# Altium PCB inverter.PcbDoc
Units mm, origin at the board's own origin, x right, y up, seen from the top; angles counter-clockwise.
Board outline 80.02 x 80 mm, 2 copper layers (Top Layer, Bottom Layer), stack 1.671 mm thick; 65 components, 34 nets, 220 pads, 421 vias.
Unrouted connection lines stored in the file: 3.
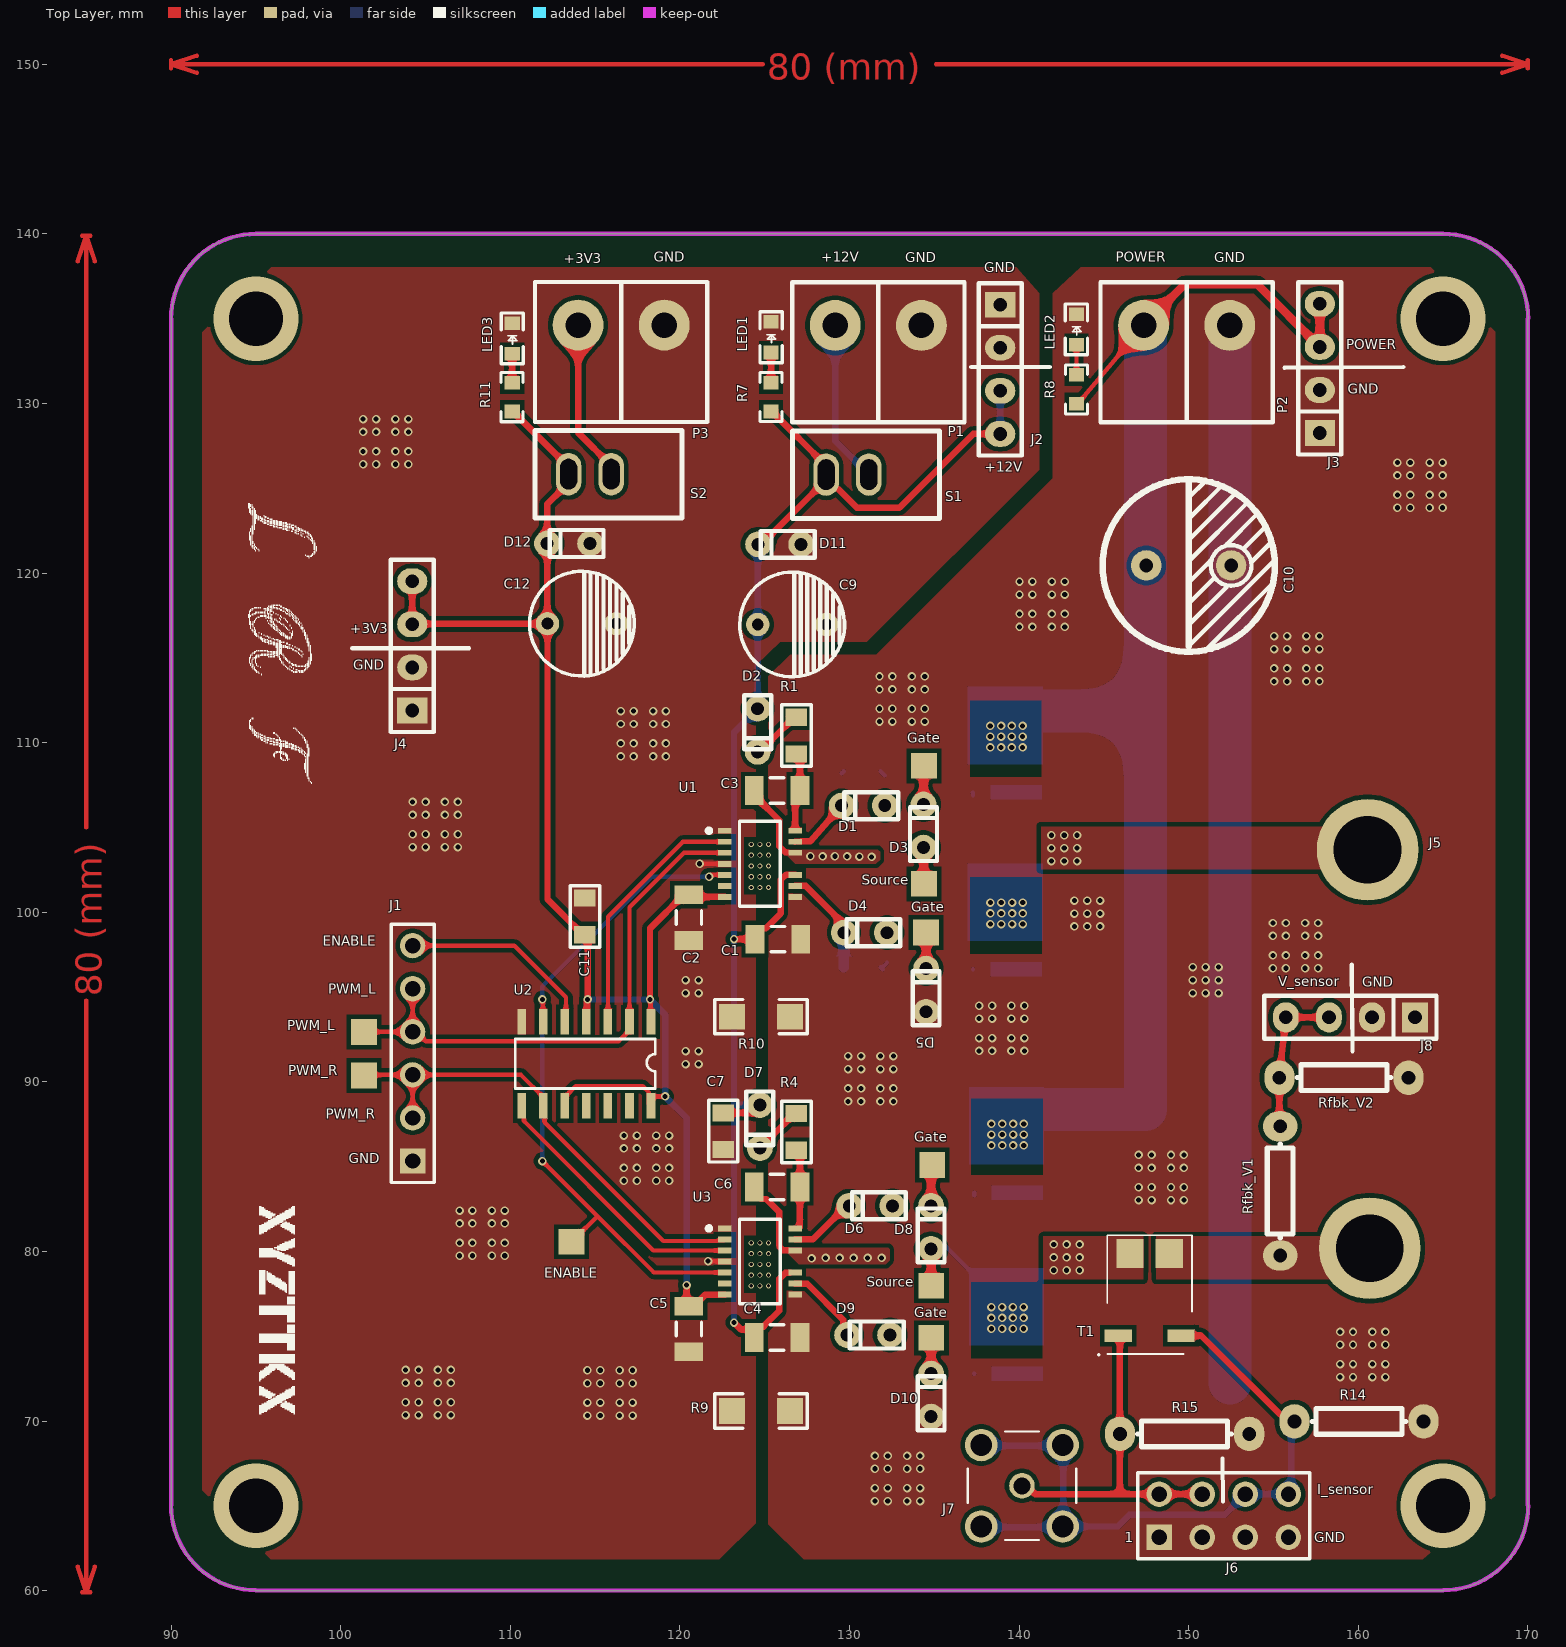
[diagram p0: Top Layer view]
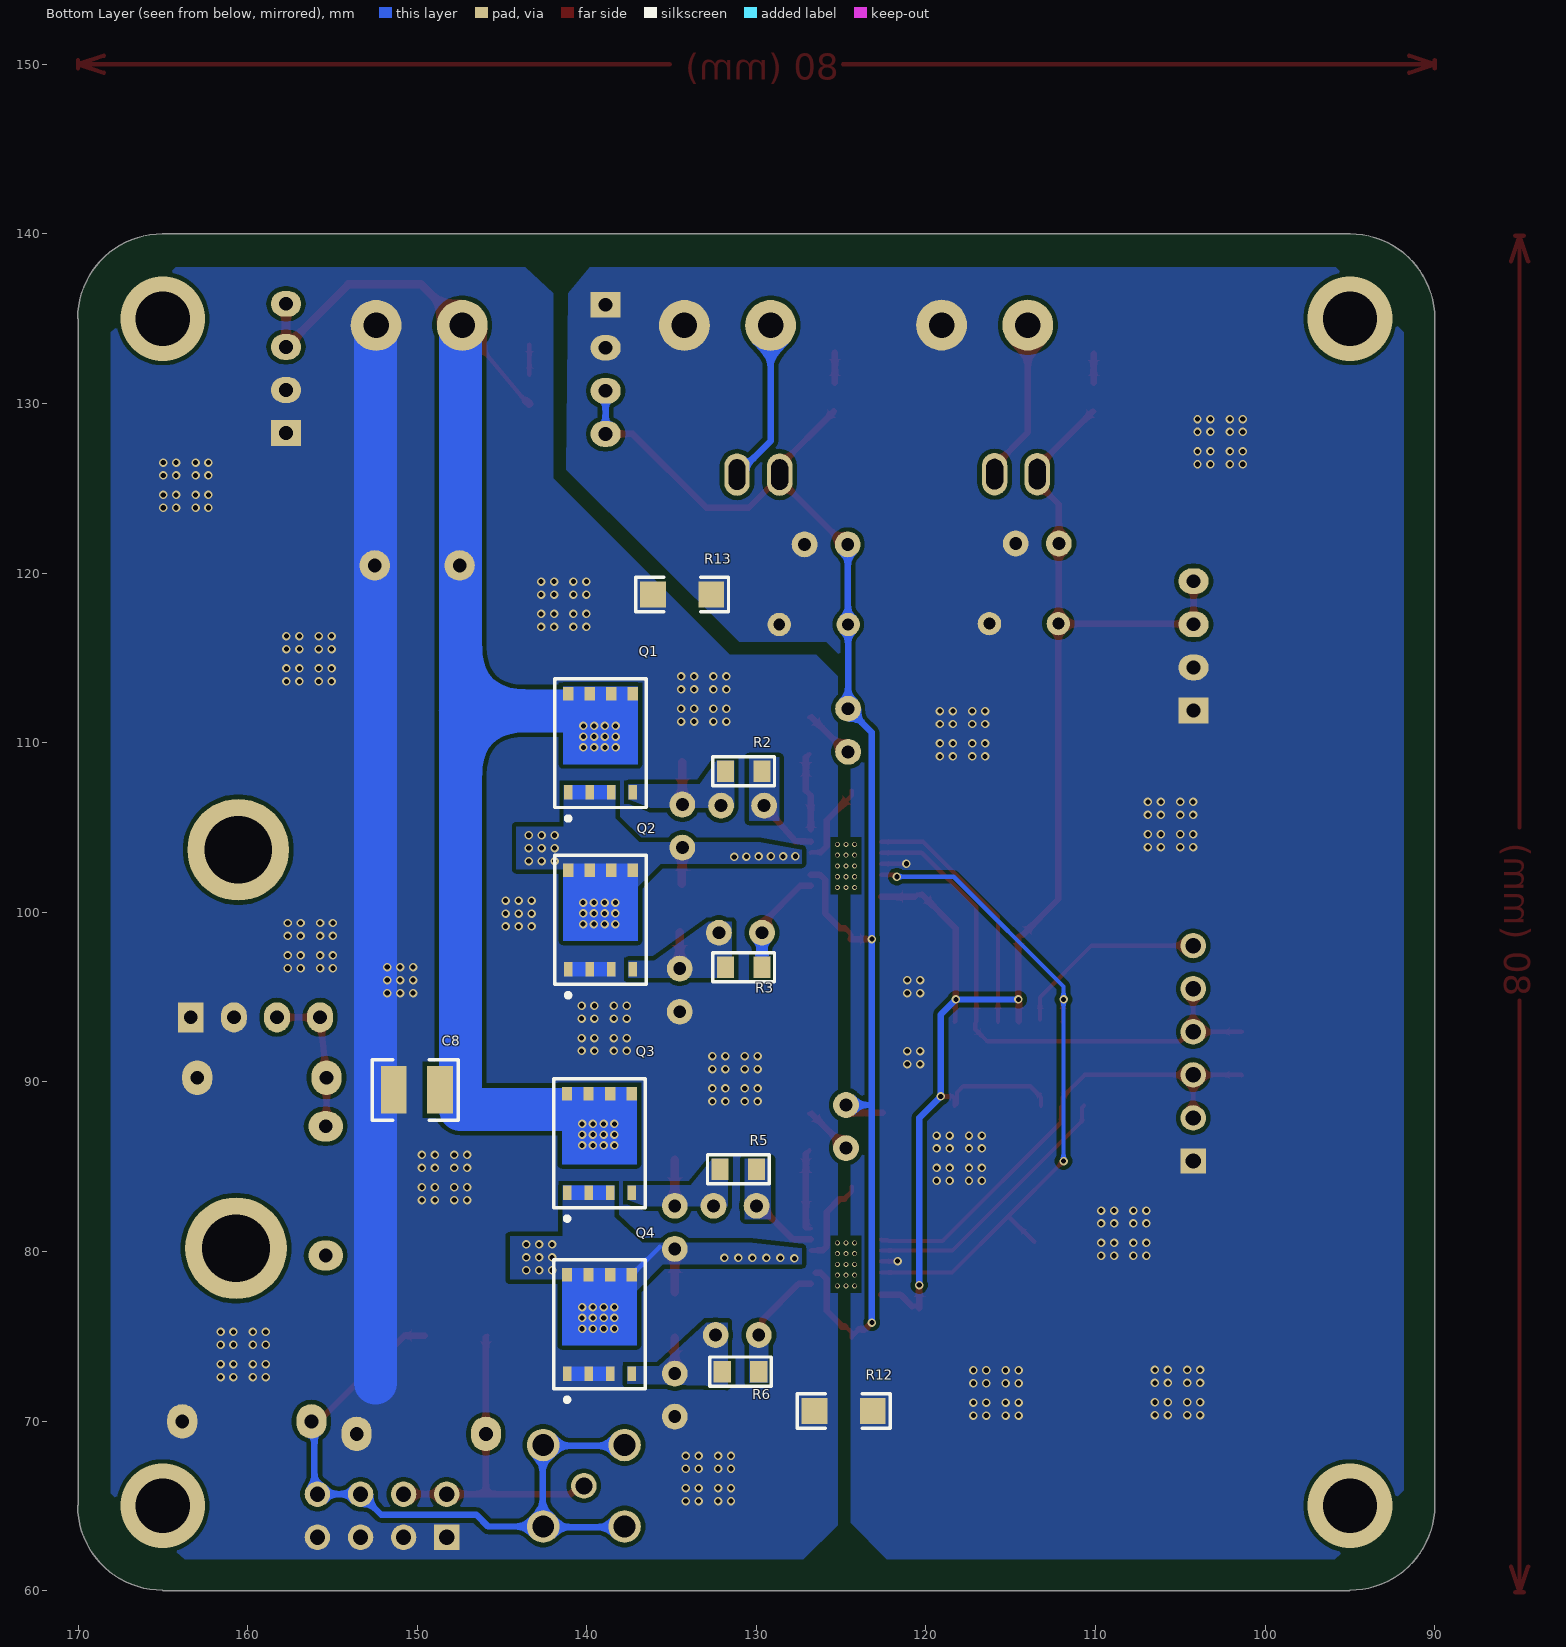
[diagram p1: Bottom Layer view, seen from below]
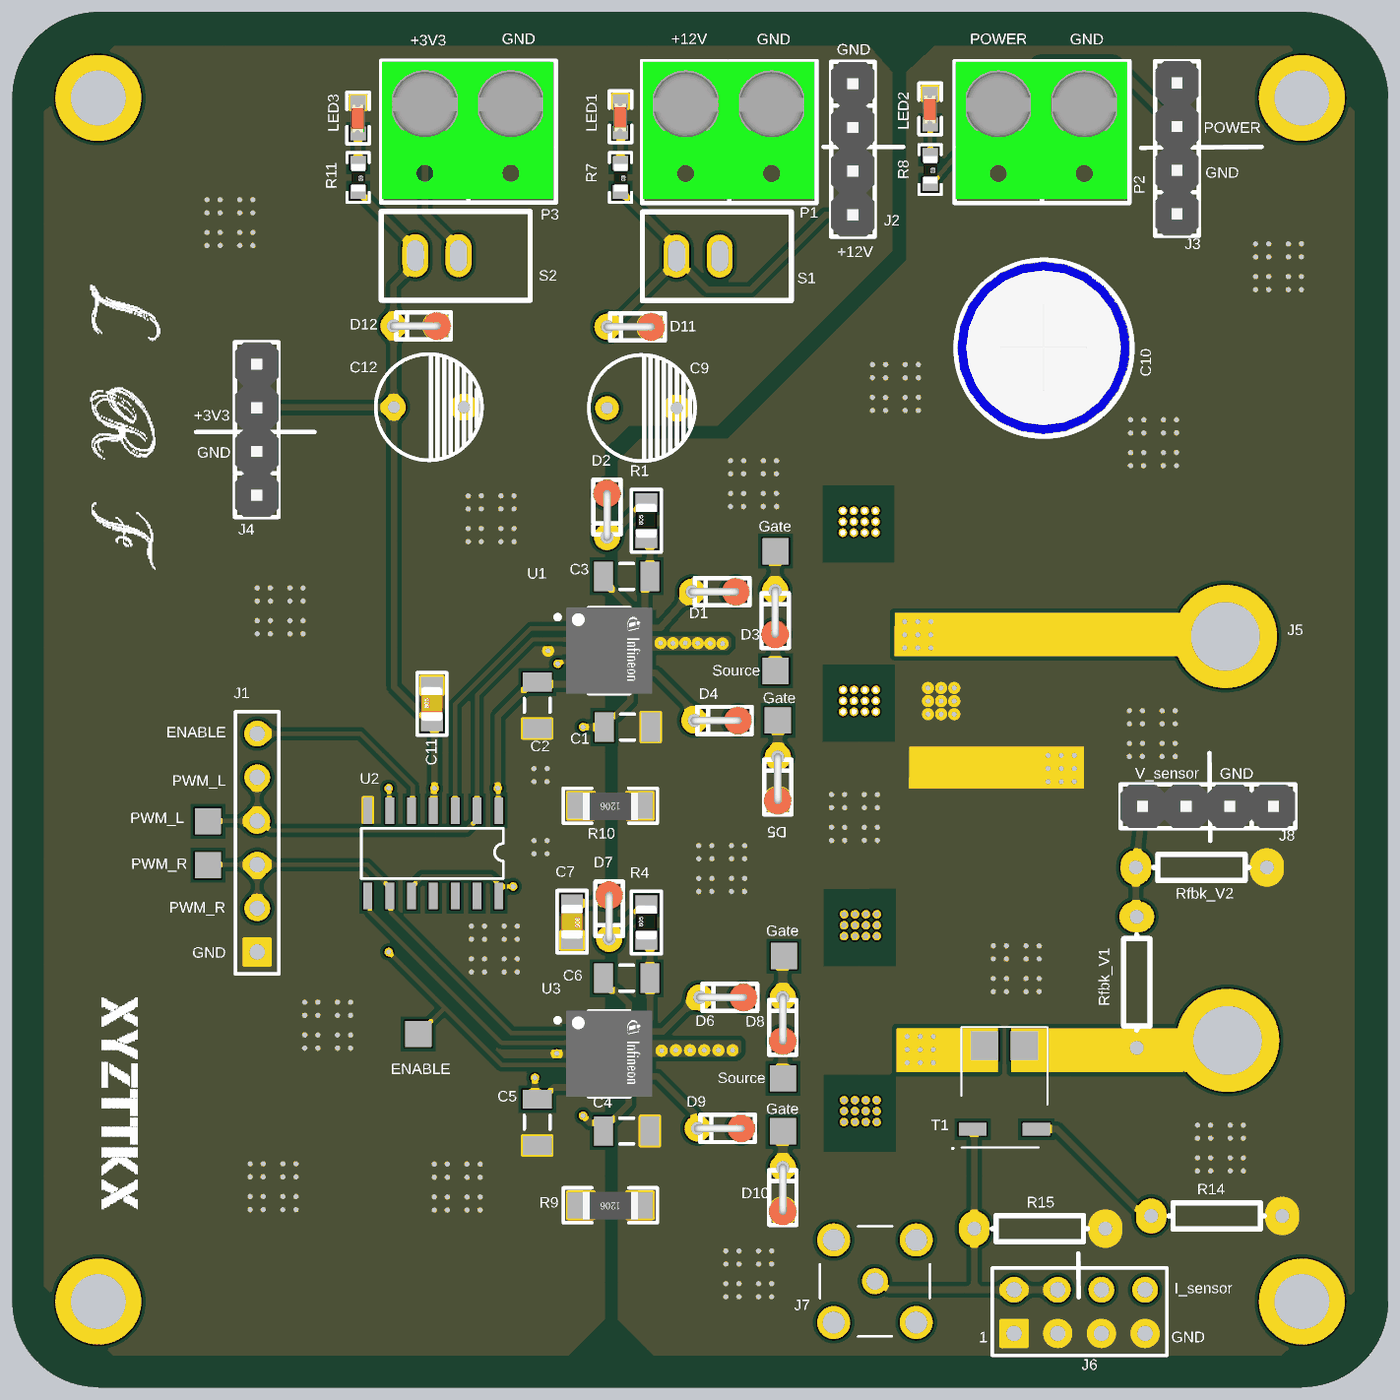
[diagram p2: 3D render of the assembled board from above, using the file's embedded part models]
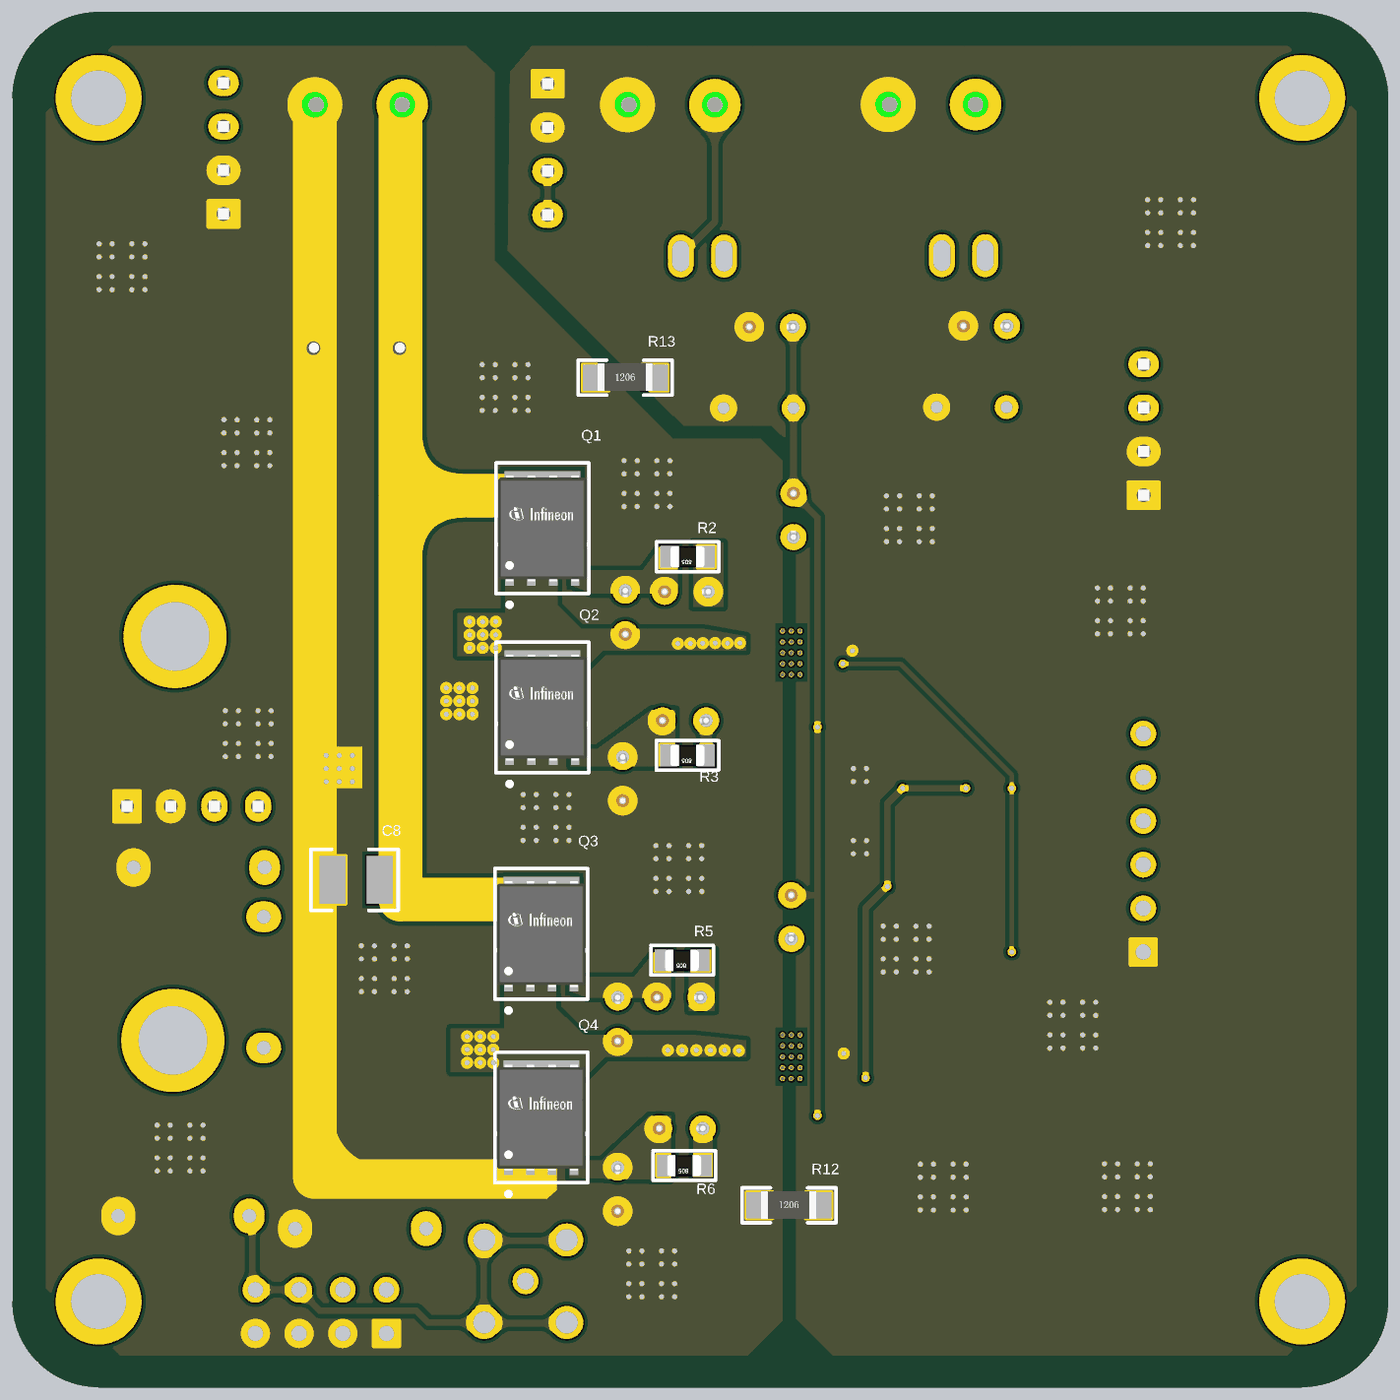
[diagram p3: 3D render of the assembled board from below, using the file's embedded part models]

## Layer stack, top to bottom
Top Solder: solder mask 0.0102, Solder Resist, Dk 3.5
Top Layer: signal copper 0.0356
Dielectric 1: dielectric 1.6, FR-4, Dk 4.8
Bottom Layer: signal copper 0.0356
Bottom Solder: solder mask 0.0102, Solder Resist, Dk 3.5

## Board outline
89.996,65.024 ccw(c94.996,65.024) 94.996,60.024 94.996,60 165,60 165.02,60.024 ccw(c165.02,65.024) 170.02,65.024 170,65.024 170,135.001 170.02,135.001 ccw(c165.02,135.001) 165.02,140.001 165,140 94.996,140 94.996,140.001 ccw(c94.996,135.001) 89.996,135.001 90,135.001

## Design rules (kind name [scope] priority, off if disabled: settings)
Clearance [All] p1: gap=0.254 ignorepadtopadclearanceinfootprint=FALSE except(0: Arc-Hole Track-Hole SMDPad-Hole THPad-Hole Via-Hole Fill-Hole Poly-Hole Region-Hole Text-Hole)
ComponentClearance [All] p1 off: gap=0.254 collisioncheckmode=3 verticalgap=0.254 showdistances=FALSE
DiffPairsRouting [All] p1 off: maxlimit=0.254 minlimit=0.254 mostfreqgap=0.254 toplayer_minwidth=0.381 toplayer_maxwidth=0.381 toplayer_prefwidth=0.381 bottomlayer_minwidth=0.381 bottomlayer_maxwidth=0.381 bottomlayer_prefwidth=0.381 maxuncoupledlength=12.7
FanoutControl Fanout_BGA [IsBGA] p1 off: bgadir=Out bgaviamode=Centered fanoutstyle=Auto fanoutdirection=Alternating viagrid=0.025 // Fanout_BGA (Default Rule)
FanoutControl Fanout_LCC [IsLCC] p2 off: bgadir=Out bgaviamode=Centered fanoutstyle=Auto fanoutdirection=Alternating viagrid=0.025 // Fanout_LCC (Default Rule)
FanoutControl Fanout_SOIC [IsSOIC] p3 off: bgadir=Out bgaviamode=Centered fanoutstyle=Auto fanoutdirection=Alternating viagrid=0.025 // Fanout_SOIC (Default Rule)
FanoutControl Fanout_Small [(CompPinCount < 5)] p4 off: bgadir=Out bgaviamode=Centered fanoutstyle=Auto fanoutdirection=OutThenIn viagrid=0.025 // Fanout_Small (Default Rule)
FanoutControl Fanout_Default [All] p5 off: bgadir=Out bgaviamode=Centered fanoutstyle=Auto fanoutdirection=Alternating viagrid=0.025 // Fanout_Default (Default Rule)
PlaneConnect PlaneConnect_1 [All] p1: planeconnectstyle=Relief reliefexpansion=0.508 reliefentries=4 reliefconductorwidth=0.254 reliefairgap=0.254
PolygonConnect [All] p1: connectstyle=Direct reliefconductorwidth=0.254 reliefentries=4 polygonreliefangle="90 Angle" airgapwidth=0.254
PolygonConnect PolygonConnect_1 [All] p2: connectstyle=Relief reliefconductorwidth=0.254 reliefentries=4 polygonreliefangle="90 Angle" airgapwidth=0.254
RoutingCorners [All] p1 off: cornerstyle=45-Degree minsetback=2.54 maxsetback=2.54
RoutingLayers [All] p1 off: top layer_v5=TRUE bottom layer_v5=TRUE
RoutingPriority [All] p1 off: routingpriority=0
RoutingTopology [All] p1 off: topology=Shortest
RoutingVias [All] p1 off: holewidth=0.711 width=1.27 viastyle="Through Hole" minholewidth=0.711 minwidth=0.2 maxholewidth=0.711 maxwidth=1.27
RoutingVias RoutingVias_1 [All] p2 off: holewidth=0.711 width=1.27 viastyle="Through Hole" minholewidth=0.711 minwidth=1.27 maxholewidth=0.711 maxwidth=1.27
SolderMaskExpansion [All] p1: expansion=0.102 istentingtop=FALSE
Width [All] p1 off: maxlimit=5.08 minlimit=0.254 preferedwidth=0.254 minimp=50.000000 maximp=50.000000 favimp=50.000000
Width Width_1 [All] p2 off: maxlimit=0.254 minlimit=0.254 preferedwidth=0.254
18 further rules are at their usual default settings.

## Components (designator, comment, footprint, x,y, rotation, side; value= is the part's Value field where it differs from the comment)
C1 "Cap" C1206 125.777,98.412 r180 top value=0.1u
C2 "Cap" C1206 120.523,99.682 r270 top value=0.1u
C3 "Cap" C1206 125.73,107.175 r0 top value=0.1u
C4 "Cap" C1206 125.73,74.917 r180 top value=0.1u
C5 "Cap" C1206 120.523,75.425 r270 top value=0.1u
C6 "Cap" C1206 125.73,83.807 r0 top value=0.1u
C7 "Cap" 0805C 122.553,88.169 r270 top value=104
C8 "104" 1210 150.368,89.522 r0 bottom
C9 "Cap" CD6 124.587,116.967 r180 top value=470u
C10 "100UF" CE/10MM 147.502,120.447 r0 top
C11 "Cap" 0805C 114.402,98.679 r90 top value=104
C12 "Cap" CD6 112.192,117.018 r180 top value=470u
D1 "BYV26" BYV26 129.413,103.746 r0 top
D2 "BYV26" 1N4148_STAND 124.587,110.731 r90 top
D3 "1N4740" 1N4148_STAND 134.366,105.08 r270 top
D4 "BYV26" BYV26 129.54,96.253 r0 top
D5 "1N4740" 1N4148_STAND 134.518,95.402 r270 top
D6 "BYV26" BYV26 129.857,80.15 r0 top
D7 "BYV26" 1N4148_STAND 124.714,87.363 r90 top
D8 "1N4740" 1N4148_STAND 134.81,81.42 r270 top
D9 "BYV26" BYV26 129.73,72.53 r0 top
D10 "1N4740" 1N4148_STAND 134.81,71.526 r270 top
D11 "1N4742" 1N4148_STAND 125.882,121.691 r0 top
D12 "1N4684" 1N4148_STAND 113.436,121.742 r0 top
J1 "Header 6" HDR1X6 104.24,85.331 r90 top
J2 "CON4" SIP4 138.887,132.016 r270 top
J3 "CON4" SIP4 157.734,132.067 r90 top
J4 "CON4" SIP4 104.216,115.709 r90 top
J5 "COIL" COILNEW 161.442,128.067 r270 top
J6 "Header 4X2" HDR2X4 148.26,63.144 r0 top
J7 "SMA_CONNECTOR" LPRS_SMA_CONNECTOR 140.17,66.18 r0 top
J8 "CON4" SIP4 159.537,93.802 r180 top
LED1 "" 0603_LED 125.374,133.006 r90 top
LED2 "" 0603_LED 143.383,133.464 r90 top
LED3 "" 0603_LED 110.109,132.934 r90 top
P1 "+12V" 050-2 131.699,134.607 r0 top
P2 "POWER" 050-2 149.884,134.607 r0 top
P3 "3V3" 050-2 116.535,134.62 r0 top
Q1 "BSC13DN30NSFD" IFX-PG-TDSON-8-V 139.192,109.978 r90 bottom
Q2 "BSC13DN30NSFD" IFX-PG-TDSON-8-V 139.192,99.555 r90 bottom
Q3 "BSC13DN30NSFD" IFX-PG-TDSON-8-V 139.255,86.382 r90 bottom
Q4 "BSC13DN30NSFD" IFX-PG-TDSON-8-V 139.255,75.705 r90 bottom
R1 "Res2" 0805R 126.873,109.334 r90 top value=2.2
R2 "Res2" 0805R 129.667,108.318 r0 bottom value=2.2
R3 "Res2" 0805R 129.667,96.761 r0 bottom value=2.2
R4 "Res2" 0805R 126.873,85.966 r90 top value=2.2
R5 "Res2" 0805R 129.984,84.849 r0 bottom value=2.2
R6 "Res2" 0805R 129.857,72.911 r0 bottom value=2.2
R7 "2K" 0603-R 125.875,131.654 r270 top
R8 "2K" 0603-R 143.883,132.111 r270 top
R9 "Res2" 1206R 126.492,70.599 r180 top value=0
R10 "Res2" 1206R 126.492,93.84 r180 top value=0
R11 "2K" 0603-R 110.609,131.652 r270 top
R12 "Res2" 1206R 126.563,70.598 r180 bottom value=0
R13 "Res2" 1206R 136.088,118.731 r180 bottom value=0
R14 "10" AXIAL0.3 160.045,69.977 r0 top
R15 "10" AXIAL0.3 149.758,69.24 r180 top
Rfbk_V1 "300K 0.1%" AXIAL0.3 155.397,83.566 r270 top value=0.05
Rfbk_V2 "300K 0.1%" AXIAL0.3 159.156,90.246 r180 top value=0.05
S1 "switch1" Switch_8.2*5.2 131.14,125.806 r90 top
S2 "switch1" Switch_8.2*5.2 115.951,125.832 r90 top
T1 "CU8965-ALC" CU8965ALD 147.701,77.457 r90 top
U1 "2EDF7275K" TFLGA65P500X500X106-14_13N-V 124.714,102.857 r0 top
U2 "74LS00" 74ls00 118.297,93.544 r270 top
U3 "2EDF7275K" TFLGA65P500X500X106-14_13N-V 124.714,79.407 r0 top

## Footprints (in the part's own frame and the unit in brackets; to place one, negate y for a bottom-side part, rotate by r counter-clockwise, add the part's x,y. Pads: shape width x height; smd on the part's side, far side on the other; paste and mask are expansions set on the pad)
1N4148_STAND [mil]
  round 60 hole 30: 1(50,0) 2(-50,0)
  silkscreen extent -44,-31 81,31, body extent -58,-32 82,32, height 186
050-2 [mm]
  round 3 hole 1.5: 1(-2.54,0) 2(2.54,0)
  silkscreen extent -5.08,-5.71 5.08,2.54, body extent -5.04,-5.5 4.96,2.5, height 11.2
74ls00 [mil]
  rect 60x20 smd: 1(0,0) 2(0,-50) 3(0,-100) 4(0,-150) 5(0,-200) 6(0,-250) 7(0,-300) 8(195,-300) 9(195,-250) 10(195,-200) 11(195,-150) 12(195,-100) 13(195,-50) 14(195,0)
  silkscreen extent 40,-315 155,10
0603-R [mm]
  rect 0.8x0.9 smd: 1(0.425,-0.5) 2(2.125,-0.5)
  silkscreen extent -0.17,-1.15 2.73,0.15, body extent 0.5,-0.88 2.1,-0.08, height 0.3
0603_LED [mm]
  rect 0.8x0.9 smd: 1(0,0) 2(1.8,0)
  silkscreen extent -0.6,-0.65 2.4,0.65, body extent 0.05,-0.37 1.67,0.43, height 0.6
0805C [mil]
  rect 40x50 smd: 1(0,0) 2(85,0)
  silkscreen extent -29,-34 114,34, body extent 3,-25 82,25, height 30
0805R [mil]
  rect 40x50 smd: 1(0,0) 2(85,0)
  silkscreen extent -29,-34 114,34, body extent 3,-25 82,25, height 30
1206R [mil]
  rect 60x60 smd: 1(0,0) 2(135,0)
  silkscreen extent -40,-40 175,40, body extent 4,-30 130,33, height 24
1210 [mil]
  rect 60x110 smd: 1(-67.5,0) 2(40,0)
  silkscreen extent -110,-70 90,70
AXIAL0.3 [mil]
  oval 70x80 hole 32: 1(-150,0) 2(150,0)
  silkscreen extent -109,-30 109,30
BYV26 [mil]
  round 60 hole 30: 1(105,100) 2(5,100)
  silkscreen extent 11,69 136,131, body extent -3,68 137,132, height 186
C1206 [mm] "Chip Capacitor, Body 3.2x1.6mm, IPC High Density"
  rect 1.1x1.7 smd: 1(-1.35,0) 2(1.35,0)
  silkscreen extent -0.4,-0.75 0.4,0.75, body extent -1.7,-0.9 1.7,0.9, height 1.3
CD6 [mm]
  round 1.38 hole 0.7: 1(0,0) 2(-4.064,0)
  silkscreen extent -5.12,-3.09 1.06,3.09
CE/10MM [mm]
  round 1.8 hole 0.8: 1(0,0) 2(5,0)
  silkscreen extent -2.58,-5.08 7.58,5.08, body extent -2.55,-5 7.5,5.05, height 16.53
COILNEW [mm]
  round 6 hole 4: 1(24.384,-0.889) 2(47.879,-0.762)
CU8965ALD [mm]
  rect 0.75x1.6 smd: 1(-2.425,1.85) 2(-2.425,-1.85)
  rect 1.7x1.6 smd: 3(2.425,-1.15) 4(2.425,1.15)
  silkscreen extent -3.6,-2.5 3.5,3.05, body extent 0,0 0,0
HDR1X6 [mm] "Connector; Header; 6 Position"
  rect 1.5x1.5 hole 0.9: 1(0,0)
  round 1.5 hole 0.9: 2(2.54,0) 3(5.08,0) 4(7.62,0) 5(10.16,0) 6(12.7,0)
  silkscreen extent -1.27,-1.27 13.97,1.27
HDR2X4 [mm] "Connector; Header; 4x2 Position"
  rect 1.5x1.5 hole 0.9: 1(0,0)
  round 1.5 hole 0.9: 2(0,2.54) 3(2.54,0) 4(2.54,2.54) 5(5.08,0) 6(5.08,2.54) 7(7.62,0) 8(7.62,2.54)
  silkscreen extent -1.27,-1.27 8.89,3.81
IFX-PG-TDSON-8-V [mm] "TDSON 8, 1.27mm pitch; 8 pin,5.90mm W X 5.15mm L X 1.10mm H body"
  rect 0.85x0.5 smd paste+0 mask+0: 1(-2.912,1.905) 2(-2.912,0.635) 3(-2.912,-0.635) 4(-2.912,-1.905)
  rect 0.8x0.6 smd paste+0 mask+0: 5(2.912,-1.905) 6(2.912,-0.635) 7(2.912,0.635) 8(2.912,1.905)
  Top Layer region: -3.339,2.155 -2.489,2.155 -2.489,-0.885 -3.339,-0.885
  Top Layer region: 3.312,2.205 -1.237,2.205 -1.237,-2.205 3.312,-2.205
  silkscreen extent -4.57,-2.7 3.8,2.7, body extent -3.09,-2.7 3.06,2.69, height 1.01
LPRS_SMA_CONNECTOR [mm]
  round 1.508 hole 1: 1(0,0)
  round 1.92 hole 1.28: G1(-2.4,2.4) G2(-2.4,-2.4) G3(2.4,-2.4) G4(2.4,2.4)
  silkscreen extent -3.2,-3.2 3.2,3.2
SIP4 [mil]
  rect 60x70 hole 32: 1(-150,0)
  oval 60x70 hole 32: 2(-50,0) 3(50,0) 4(150,0)
  silkscreen extent -200,-50 200,50, body extent -200,-50 200,50, height 336
Switch_8.2*5.2 [mm]
  oval 2.5x1.5 hole 1 slot 1.8 at 0 deg: 1(0,2.515) 2(0,0)
  silkscreen extent -2.59,-4.17 2.57,4.5
TFLGA65P500X500X106-14_13N-V [mm] "TFLGA,0.65mm pitch;13 pin,5.00mm W X 5.00mm L X 1.06mm H body (w/pullback leads)"
  rect 0.8x0.35 smd paste-0.8 mask+0: 1(-2.075,1.95) 2(-2.075,1.3) 3(-2.075,0.65) 4(-2.075,0) 5(-2.075,-0.65) 6(-2.075,-1.3) 7(-2.075,-1.95) 8(2.075,-1.95) 9(2.075,-1.3) 10(2.075,-0.65) 11(2.075,0.65) 12(2.075,1.3) 13(2.075,1.95)
  silkscreen extent -3.12,-2.5 1.2,2.5, body extent -2.5,-2.5 2.5,2.5, height 1.07

## Part data
C1 C2 C3 C4 C5 C6 C7 C9 C11 C12: "Capacitor", LatestRevisionDate=17-Jul-2002, LatestRevisionNote="Re-released for DXP Platform.", PackageDescription="Radial Cap, Thru-Hole; 2 Leads; 0.3 in Pin Spacing", PackageReference=RAD-0.3, Published=8-Jun-2000, Publisher="Altium Limited"
C8: library part CBB
C10: library part ELECTRO1, "电解电容"
D1 D2 D4 D6 D7 D9: library part "Diode 1N4007", "1 Amp General Purpose Rectifier", Code_JEDEC=DO-204-AL, ComponentLink1Description="Manufacturer Link", ComponentLink1URL=http://www.fairchildsemi.com/, ComponentLink2Description=Datasheet, ComponentLink2URL=http://www.fairchildsemi.com/ds/1N%2F1N4001.pdf, DatasheetVersion=1998, LatestRevisionDate=17-Jul-2002, LatestRevisionNote="Re-released for DXP Platform.", PackageDescription="Diode, Axial; Body 5.2 x 2.7 mm (LxDia. max), Lead Dia. 0.86 mm (max)", PackageReference=DO-41, PackageVersion=Aug-1999, Published=8-Jun-2000, Publisher="Altium Limited"
D3 D5 D8 D10 D11 D12: library part "D Zener", "Zener Diode", LatestRevisionDate=17-Jul-2002, LatestRevisionNote="Re-released for DXP Platform.", PackageDescription="Diode, Thru-Hole; 2 Leads; 0.7 in Pin Spacing", PackageReference=DIODE-0.7, Published=8-Jun-2000, Publisher="Altium Limited"
J1: "Header, 6-Pin", LatestRevisionDate=17-Jul-2002, LatestRevisionNote="Re-released for DXP Platform.", Publisher="Altium Limited"
J2 J3 J4 J8: "Connector"
J5: library part CON2, "Connector"
J6: "Header, 4-Pin, Dual row", LatestRevisionDate=17-Jul-2002, LatestRevisionNote="Re-released for DXP Platform.", Publisher="Altium Limited"
J7: "Straight SMA Connector", Package=None, Availability=Unavailable, MP=SMA_CONNECTOR, Price=None
LED1 LED2 LED3: library part LED2, "Typical RED, GREEN, YELLOW, AMBER GaAs LED", LatestRevisionDate=17-Jul-2002, LatestRevisionNote="Re-released for DXP Platform.", PackageDescription="SM LED; 2 Flat Leads", PackageReference=3.2X1.6X1.1, PackageVersion=Feb-2002, Published=8-Jun-2000, Publisher="Altium Limited"
P1 P3: library part POWER
Q1 Q2 Q3 Q4: "Insulated-Gate Field-Effect Transistor (IGFET), N-Channel, Enhancement, Body Diode, Pin 1 Source, 2 Source, 3 Source, 4 Gate, 5 Drain, 6 Drain, 7 Drain, 8 Drain, 8 Pins", Manufacturer="Infineon Technologies", Manufacturer Order Number=BSC13DN30NSFD, PackageReference=PG-TDSON-8-1
R1 R2 R3 R4 R5 R6 R9 R10 R12 R13: "Resistor", LatestRevisionDate=17-Jul-2002, LatestRevisionNote="Re-released for DXP Platform.", PackageDescription="Axial Device, Thru-Hole; 2 Leads; 0.4 in Pin Spacing", PackageReference=AXIAL-0.4, Published=8-Jun-2000, Publisher="Altium Limited"
R7 R8 R11 R14 R15: library part RES
Rfbk_V1 Rfbk_V2: library part Res2, "Resistor", LatestRevisionDate=17-Jul-2002, LatestRevisionNote="Re-released for DXP Platform.", PackageDescription="Axial Device, Thru-Hole; 2 Leads; 0.4 in Pin Spacing", PackageReference=AXIAL-0.4, Published=8-Jun-2000, Publisher="Altium Limited"
T1: "Transformer", Manufacturer_Name=COILCRAFT, Datasheet Link=https://www.mouser.co.uk/datasheet/2/597/cu8965-774485.pdf, Height=3mm, Manufacturer_Part_Number=CU8965-ALC
U1 U3: "Dual-Channel, Functional and Reinforced Isolated MOSFET Gate-Driver", Alternate View=No, Multiple Parts=No, Symbol Type="Dual-Channel, Functional and Reinforced Isolated MOSFET Gate-Driver"

## Free pads (board coordinates)
  rect 1.524x1.524 smd: 2(101.371,90.373) 2(101.371,92.939) 2(113.614,80.569) 2(134.391,101.676) 2(134.391,108.636) 2(134.518,98.806) 2(134.823,74.905) 2(134.823,77.978) 2(134.88,85.096)

## Via types
v1: diameter 0.5, hole 0.3, Top Layer to Bottom Layer, tented both sides, 280 vias
v2: diameter 0.5, hole 0.3, Top Layer to Bottom Layer, 107 vias
v3: diameter 0.3, hole 0.2, Top Layer to Bottom Layer, 30 vias
v4: diameter 5, hole 3.2, Top Layer to Bottom Layer, 4 vias

## Nets (pads, with @x,y where several pads share a name; then routed paths per layer and width w, separated by ;. In a path a pad name is that pad's centre, name@x,y a point inside that pad or via, vN(x,y) a via of type N, cw(c..) or ccw(c..) an arc to the next point about the centre after c; other vN are vias at no path point)
+3V3: C2.1 C5.1 C11.1 C12.1 D12.2 J4.3 J4.4 R11.2 S2.1 U1.7 U2.1 U2.4 U2.10 U2.14 U3.7 | length 93.6
  Top Layer w0.254: J4.3 J4.3@104.236,116.998 ; R11.2@110.059,129.527 R11.2 R11.2@110.159,129.527 ; D12.2 D12.2@112.179,121.73 ; C12.1@112.172,116.998 C12.1 C12.1@112.179,117.03 ; U2.10 113.217,89.099 113.852,89.734 117.809,89.734 118.17,89.373 118.17,88.718 U2.14@118.212,88.675 ; S2.1@113.436,125.332 S2.1 S2.1@113.436,126.249 ; C11.1@114.275,98.679 C11.1 C11.1@114.554,98.527 ; U2.4 U2.4@114.52,93.577 ; v2@114.52,94.822 v2(114.554,94.856) ; v2(118.237,94.856) 118.267,94.826 118.267,93.573 U2.1 ; U2.14 118.297,89.014 118.424,89.141 v2(119.126,89.141) ; C2.1@120.223,101.032 C2.1 C2.1@120.648,100.907 ; C5.1@120.396,76.648 C5.1@120.546,76.734 ; C5.1 C5.1@120.823,76.775
  Top Layer w0.381: J4.3 J4.4 ; J4.3@104.236,116.998 C12.1@112.172,116.998 ; R11.2@110.159,129.527 S2.1@113.436,126.249 ; D12.2 112.166,124.062 S2.1@113.436,125.332 ; C12.1@112.179,117.03 D12.2@112.179,121.73 ; C12.1 112.192,100.762 C11.1@114.275,98.679 ; U2.4@114.52,93.577 v2@114.52,94.822 ; v2(114.554,94.856) C11.1@114.554,98.527 ; v2(118.237,94.856) 118.237,99.046 C2.1@120.223,101.032 ; C5.1@120.396,76.648 v2(120.396,78.012) ; C2.1@120.648,100.907 U1.7 ; C5.1@120.823,76.775 121.505,77.457 U3.7
  Bottom Layer w0.381: v2(114.554,94.856) v2(118.237,94.856) 119.126,93.967 v2(119.126,89.141) 120.396,87.871 v2(120.396,78.012)
+12: C1.2 C4.2 C7.1 C9.1 D2.1 D7.1 D11.2 J2.3 J2.4 R7.2 S1.1 U1.10 U3.10 | length 90.6
  Top Layer w0.254: C4.2@123.957,75.398 C4.2@124.38,74.975 ; D7.1@124.25,88.169 D7.1 ; C4.2 C4.2@124.38,74.975 ; C1.2 124.427,98.704 124.785,99.062 C1.2@124.85,99.127 ; D11.2 D11.2@124.812,121.691 ; C4.2@124.803,75.64 124.38,75.217 C4.2@124.38,74.975 ; R7.2 R7.2@125.424,129.528 ; S1.1@128.626,125.505 S1.1@128.626,125.643 ; S1.1@128.626,126.327 S1.1 S1.1@128.626,125.643 ; 129.351,124.94 129.329,124.94 128.695,125.574 S1.1@128.626,125.643
  Top Layer w0.381: C7.1 D7.1@124.25,88.169 ; v2(123.19,75.806) 123.598,75.398 C4.2@123.957,75.398 ; v2(123.19,98.412) C1.2 ; C4.2@124.764,75.571 124.955,75.571 ; C1.2@124.782,99.062 124.785,99.062 125.074,99.062 ; D11.2@124.812,121.691 S1.1@128.626,125.505 ; 124.994,75.64 125.857,76.502 125.857,78.378 126.205,78.726 ; 125.142,99.127 125.945,99.929 125.945,100.547 125.945,101.916 126.205,102.176 ccw(c126.11,102.545) 126.285,102.207 U1.10 ; R7.2@125.424,129.528 S1.1@128.626,126.327 ; 126.208,78.753 U3.10@126.495,78.753 ; 129.351,124.94 130.441,123.85 132.944,123.85 137.299,128.206 J2.4
  Bottom Layer w0.254: 123.19,88.781 123.339,88.633 ; C9.1 C9.1@124.6,116.98 ; D11.2@124.6,121.679 D11.2 ; S1.1@128.626,125.552 S1.1 S1.1@128.803,125.628 ; J2.3@138.709,130.568 J2.3
  Bottom Layer w0.381: v2(123.19,75.806) 123.19,88.781 v2(123.19,98.412) 123.19,110.604 D2.1 C9.1 ; 123.339,88.633 D7.1 ; C9.1@124.6,116.98 D11.2@124.6,121.679 ; S1.1@128.803,125.552 S1.1@128.803,125.628 ; J2.4 J2.3
AGND: C2.2 C5.2 C7.2 C9.2 C11.2 C12.2 D11.1 D12.1 J1.1 J2.1 J2.2 J4.1 J4.2 LED1.2 LED3.2 P1.2 P3.2 R9.2 R10.2 R12.2 R13.2 U1.1 U1.4 U2.7 U3.1 U3.4 | length 2.5
  Top Layer w0.254: v2(121.158,102.857) 122.366,102.857 U1.4 ; v2(121.666,79.426) 121.675,79.416 122.629,79.416 U3.4
  other v1: 103.83,70.344 104.592,70.344 105.735,70.344 106.497,70.344 114.54,70.324 115.302,70.324 116.445,70.324 117.207,70.324 103.83,71.106 104.592,71.106 105.735,71.106 106.497,71.106 114.54,71.086 115.302,71.086 116.445,71.086 117.207,71.086 103.83,72.249 104.592,72.249 105.735,72.249 106.497,72.249 114.54,72.229 115.302,72.229 116.445,72.229 117.207,72.229 103.83,73.011 104.592,73.011 105.735,73.011 106.497,73.011 114.54,72.991 115.302,72.991 116.445,72.991 117.207,72.991 107.005,79.742 107.767,79.742 108.91,79.742 109.672,79.742 107.005,80.504 107.767,80.504 108.91,80.504 109.672,80.504 107.005,81.647 107.767,81.647 108.91,81.647 109.672,81.647 107.005,82.409 107.767,82.409 108.91,82.409 109.672,82.409 116.699,84.167 117.461,84.167 118.604,84.167 119.366,84.167 116.699,84.929 117.461,84.929 118.604,84.929 119.366,84.929 116.699,86.072 117.461,86.072 118.604,86.072 119.366,86.072 116.699,86.834 117.461,86.834 118.604,86.834 119.366,86.834 120.34,91.045 121.102,91.045 120.34,91.807 121.102,91.807 120.34,95.236 121.102,95.236 120.34,95.998 121.102,95.998 104.242,103.835 105.004,103.835 106.147,103.835 106.909,103.835 104.242,104.597 105.004,104.597 106.147,104.597 106.909,104.597 104.242,105.74 105.004,105.74 106.147,105.74 106.909,105.74 104.242,106.502 105.004,106.502 106.147,106.502 106.909,106.502 116.51,109.195 117.272,109.195 118.415,109.195 119.177,109.195 116.51,109.957 117.272,109.957 118.415,109.957 119.177,109.957 116.51,111.1 117.272,111.1 118.415,111.1 119.177,111.1 116.51,111.862 117.272,111.862 118.415,111.862 119.177,111.862 101.321,126.416 102.083,126.416 103.226,126.416 103.988,126.416 101.321,127.178 102.083,127.178 103.226,127.178 103.988,127.178 101.321,128.321 102.083,128.321 103.226,128.321 103.988,128.321 101.321,129.083 102.083,129.083 103.226,129.083 103.988,129.083
GND: C1.1 C4.1 C8.2 C10.2 D5.1 D10.1 J3.1 J3.2 J6.1 J6.3 J6.5 J6.7 J8.1 J8.2 LED2.2 P2.2 Q2.1 Q2.2 Q2.3 Q4.1 Q4.2 Q4.3 R9.1 R10.1 R12.1 R13.1 R14.2 R15.1 Rfbk_V2.1 U1.8 U3.8 | length 63.8
  Bottom Layer w0.254: Q2.3@138.501,96.642 Q2.3 Q2.2 ; 140.335,96.38 140.335,96.507
  Bottom Layer w2.54: P2.2 152.447,134.607 152.447,123.05 152.447,96.761 152.447,95.237 152.447,89.522 152.447,72.242
  other v1: 131.496,65.278 132.258,65.278 133.401,65.278 134.163,65.278 131.496,66.04 132.258,66.04 133.401,66.04 134.163,66.04 131.496,67.183 132.258,67.183 133.401,67.183 134.163,67.183 131.496,67.945 132.258,67.945 133.401,67.945 134.163,67.945 158.928,72.593 159.69,72.593 160.833,72.593 161.595,72.593 158.928,73.355 159.69,73.355 160.833,73.355 161.595,73.355 158.928,74.498 159.69,74.498 160.833,74.498 161.595,74.498 158.928,75.26 159.69,75.26 160.833,75.26 161.595,75.26 147.052,83.024 147.814,83.024 148.957,83.024 149.719,83.024 147.052,83.786 147.814,83.786 148.957,83.786 149.719,83.786 147.052,84.929 147.814,84.929 148.957,84.929 149.719,84.929 147.052,85.691 147.814,85.691 148.957,85.691 149.719,85.691 129.921,88.849 130.683,88.849 131.826,88.849 132.588,88.849 129.921,89.611 130.683,89.611 131.826,89.611 132.588,89.611 129.921,90.754 130.683,90.754 131.826,90.754 132.588,90.754 129.921,91.516 130.683,91.516 131.826,91.516 132.588,91.516 137.643,91.821 138.405,91.821 139.548,91.821 140.31,91.821 137.643,92.583 138.405,92.583 139.548,92.583 140.31,92.583 137.643,93.726 138.405,93.726 139.548,93.726 140.31,93.726 137.643,94.488 138.405,94.488 139.548,94.488 140.31,94.488 154.965,96.698 155.727,96.698 156.87,96.698 157.632,96.698 154.965,97.46 155.727,97.46 156.87,97.46 157.632,97.46 154.965,98.603 155.727,98.603 156.87,98.603 157.632,98.603 154.965,99.365 155.727,99.365 156.87,99.365 157.632,99.365 131.77,111.238 132.532,111.238 133.675,111.238 134.437,111.238 131.77,112 132.532,112 133.675,112 134.437,112 131.77,113.143 132.532,113.143 133.675,113.143 134.437,113.143 155.042,113.614 155.804,113.614 156.947,113.614 157.709,113.614 131.77,113.905 132.532,113.905 133.675,113.905 134.437,113.905 155.042,114.376 155.804,114.376 156.947,114.376 157.709,114.376 155.042,115.519 155.804,115.519 156.947,115.519 157.709,115.519 155.042,116.281 155.804,116.281 156.947,116.281 157.709,116.281 140.025,116.826 140.787,116.826 141.93,116.826 142.692,116.826 140.025,117.588 140.787,117.588 141.93,117.588 142.692,117.588 140.025,118.731 140.787,118.731 141.93,118.731 142.692,118.731 140.025,119.493 140.787,119.493 141.93,119.493 142.692,119.493 162.306,123.85 163.068,123.85 164.211,123.85 164.973,123.85 162.306,124.612 163.068,124.612 164.211,124.612 164.973,124.612 162.306,125.755 163.068,125.755 164.211,125.755 164.973,125.755 162.306,126.517 163.068,126.517 164.211,126.517 164.973,126.517
  other v2: 150.241,95.237 151.003,95.237 151.765,95.237 150.241,95.999 151.003,95.999 151.765,95.999 150.241,96.761 151.003,96.761 151.765,96.761 143.256,99.162 144.018,99.162 144.78,99.162 143.256,99.924 144.018,99.924 144.78,99.924 143.256,100.686 144.018,100.686 144.78,100.686
NetC3_1: C3.1 D3.1 J5.1 pad.2@134.391,101.676 Q1.1 Q1.2 Q1.3 Q2.5 Q2.6 Q2.7 Q2.8 U1.11 | length 8.8
  Top Layer w0.254: C3.1 124.38,106.875 124.803,106.452 C3.1@124.827,106.452 ; 126.277,103.537 126.759,103.537 U1.11
  Top Layer w0.381: C3.1@124.827,106.452 125.857,105.422 125.857,103.885 126.205,103.537 126.277,103.537
  Top Layer w0.508: D3.1 pad.2@134.391,101.676
  Bottom Layer w0.254: Q2.5@137.114,102.74 137.287,102.567 Q2.5 ; Q1.3@138.501,107.065 Q1.3 Q1.2
  other v2: 138.313,99.302 138.948,99.302 139.583,99.302 140.218,99.302 138.313,99.937 138.948,99.937 139.583,99.937 140.218,99.937 138.313,100.572 138.948,100.572 139.583,100.572 140.218,100.572 141.899,103.017 142.661,103.017 143.423,103.017 129.863,103.288 130.584,103.277 131.306,103.266 127.698,103.299 128.419,103.289 129.141,103.299 141.899,103.779 142.661,103.779 143.423,103.779 141.899,104.541 142.661,104.541 143.423,104.541
NetC3_2: C3.2 R1.1 U1.13 | length 4.7
  Top Layer w0.254: C3.2@126.789,106.884 C3.2 ; R1.1 R1.1@127.08,109.127
  Top Layer w0.381: U1.13@126.789,104.888 C3.2@126.789,106.884 ; C3.2 R1.1@127.08,109.127
NetC6_1: C6.1 D8.1 pad.2@134.823,77.978 Q3.1 Q3.2 Q3.3 Q4.5 Q4.6 Q4.7 Q4.8 T1.4 U3.11 | length 10.7
  Top Layer w0.254: C6.1 124.38,83.514 C6.1@124.803,83.091 ; 126.361,80.057 U3.11 ; pad.2@134.81,77.585 pad.2@134.823,77.978
  Top Layer w0.381: C6.1@124.803,83.091 125.095,83.091 125.857,82.33 125.857,80.378 125.879,80.258 125.969,80.168 126.08,80.057 126.361,80.057
  Top Layer w0.508: pad.2@134.81,77.585 D8.1
  Bottom Layer w0.254: 135.69,80.277 137.077,78.89 137.177,78.89 137.35,78.717 Q4.5
  other v2: 138.366,75.442 139.001,75.442 139.636,75.442 140.271,75.442 138.366,76.077 139.001,76.077 139.636,76.077 140.271,76.077 138.366,76.712 139.001,76.712 139.636,76.712 140.271,76.712 142.044,78.89 142.806,78.89 143.568,78.89 127.762,79.589 128.588,79.616 129.413,79.616 130.238,79.616 131.064,79.616 131.889,79.616 142.044,79.652 142.806,79.652 143.568,79.652 142.044,80.414 142.806,80.414 143.568,80.414
NetC6_2: C6.2 R4.1 U3.13 | length 4.9
  Top Layer w0.254: U3.13 127.014,81.357 U3.13@127.08,81.423 ; R4.1 R4.1@127.08,85.759
  Top Layer w0.381: U3.13@127.08,81.423 C6.2 R4.1@127.08,85.759
NetD1_1: D1.1 D3.2 pad.2@134.391,108.636 Q1.4 R2.2 | length 3.3
  Top Layer w0.254: pad.2@134.366,108.839 pad.2@134.391,108.636
  Top Layer w0.508: D3.2 pad.2@134.366,108.839
  Bottom Layer w0.254: R2.2 R2.2@132.08,108.064 ; Q1.4@137.269,107.048 Q1.4 Q1.4@137.287,106.89
NetD1_2: D1.2 R2.1 U1.12 | length 3.9
  Top Layer w0.381: U1.12 126.805,104.172 127.132,104.172 127.145,104.185 127.693,104.185 D1.2
  Bottom Layer w0.254: R2.1@129.54,108.191 R2.1
NetD2_2: D2.2 R1.2 | length 3.1
  Top Layer w0.254: D2.2 D2.2@124.714,109.461 ; R1.2@126.746,111.493 R1.2
  Top Layer w0.381: D2.2@124.714,109.461 R1.2@126.746,111.493
NetD4_1: D4.1 D5.2 pad.2@134.518,98.806 Q2.4 R3.2 | length 2.8
  Top Layer w0.508: D5.2 pad.2@134.518,98.806
  Bottom Layer w0.254: R3.2 R3.2@131.889,96.697 ; R3.2@131.953,96.634 R3.2@131.889,96.697 ; R3.2@132.207,97.015 R3.2@131.889,96.697 ; Q2.4@137.278,96.634 Q2.4
NetD4_2: D4.2 R3.1 U1.9 | length 5.7
  Top Layer w0.381: U1.9 127.411,101.557 D4.2@129.54,99.428
  Bottom Layer w0.635: R3.1 D4.2
NetD6_1: D6.1 D8.2 pad.2@134.88,85.096 Q3.4 R5.2 | length 3.2
  Top Layer w0.254: pad.2@134.81,85.407 pad.2@134.88,85.096
  Top Layer w0.508: D8.2 pad.2@134.81,85.407
  Bottom Layer w0.254: Q3.4@137.35,83.294 Q3.4
NetD6_2: D6.2 R5.1 U3.12 | length 4
  Top Layer w0.254: D6.2@129.82,82.69 D6.2
  Top Layer w0.381: U3.12 127.837,80.707 D6.2@129.82,82.69
NetD7_2: D7.2 R4.2 | length 3
  Top Layer w0.254: R4.2@126.746,88.125 R4.2
  Top Layer w0.381: D7.2 R4.2@126.746,88.125
NetD9_1: D9.1 D10.2 pad.2@134.823,74.905 Q4.4 R6.2 | length 2.1
  Top Layer w0.508: D10.2 pad.2@134.81,74.891
  Bottom Layer w0.254: Q4.4@137.341,72.784 Q4.4
NetD9_2: D9.2 R6.1 U3.9 | length 4.7
  Top Layer w0.254: U3.9 U3.9@126.837,78.059 ; D9.2@129.639,75.288 D9.2
  Top Layer w0.381: U3.9@126.804,78.092 127.508,78.092 ; 127.541,78.059 129.639,75.96 D9.2@129.639,75.288
NetJ1_2: J1.2 J1.3 pad.2@101.371,90.373 U2.9 U3.2 | length 28.7
  Top Layer w0.254: pad.2@101.371,90.373 101.409,90.411 J1.3 ; J1.2 J1.3 ; U3.2 122.591,80.659 122.263,80.659 122.217,80.613 119.018,80.613 112.017,87.614 112.017,88.52 U2.9 111.947,89.099 110.635,90.411 J1.3
NetJ1_4: J1.4 J1.5 pad.2@101.371,92.939 U1.3 U2.2 | length 32.8
  Top Layer w0.254: pad.2@101.371,92.939 101.383,92.951 J1.4 ; J1.5 J1.4 ; U2.2 117.027,100.289 120.244,103.507 U1.3 ; U2.2@117.096,93.459 117.096,93.105 116.392,92.401 105.012,92.401 104.462,92.951 J1.4
NetJ1_6: J1.6 U2.5 | length 11.6
  Top Layer w0.254: J1.6 110.236,98.031 113.28,94.987 U2.5@113.28,93.69
NetJ5_2: J5.2 Rfbk_V1.2 T1.3
NetJ6_2: J6.2 J6.4 J7.1 R15.2 T1.1 | length 20.3
  Top Layer w0.254: T1.1 T1.1@145.948,74.934
  Top Layer w0.381: J7.1 140.461,66.18 140.956,65.684 145.948,65.684 ; J7.1@140.195,66.586 J7.1@140.258,66.65 ; T1.1@145.948,74.934 R15.2 145.948,65.684 ; J6.4 J6.2 145.948,65.684
NetJ6_6: J6.6 J6.8 J7.G1 J7.G2 J7.G3 J7.G4 R14.1 T1.2 | length 42
  Top Layer w0.254: J6.6 J6.6@153.568,65.913 ; 155.385,70.396 155.817,70.396 R14.1 R14.1@156.058,69.799 ; J6.8 J6.8@156.058,65.862
  Top Layer w0.381: T1.2 150.749,75.032 155.385,70.396
  Bottom Layer w0.381: J7.G2@137.808,63.742 142.608,63.742 J7.G3@142.608,63.78 ; J7.G1@137.808,68.542 142.608,68.542 J7.G3@142.608,63.78 ; J7.G3 J7.G3@142.608,63.78 ; J6.8 J6.6 152.121,64.465 146.507,64.465 145.822,63.78 J7.G3@142.608,63.78 ; J6.8@156.058,65.862 R14.1@156.058,69.799
NetJ8_3: J8.3 J8.4 Rfbk_V1.1 Rfbk_V2.2 | length 9
  Top Layer w0.254: Rfbk_V1.1@155.346,87.376 Rfbk_V1.1 ; Rfbk_V2.2 Rfbk_V2.2@155.346,90.373 ; J8.4@155.727,93.675 J8.4
  Top Layer w0.381: Rfbk_V1.1@155.346,87.376 Rfbk_V2.2 ; Rfbk_V2.2@155.346,90.373 J8.4@155.727,93.675 ; J8.4 J8.3
NetLED1_1: LED1.1 R7.1 | length 1.8
  Top Layer w0.381: R7.1 LED1.1
NetLED2_1: LED2.1 R8.1 | length 1.8
  Top Layer w0.254: R8.1 LED2.1
NetLED3_1: LED3.1 R11.1 | length 1.7
  Top Layer w0.381: R11.1 LED3.1
NetP1_1: P1.1 S1.2 | length 9.7
  Bottom Layer w0.381: P1.1 129.159,127.787 130.426,126.52 130.623,126.52 131.14,126.003 S1.2
NetP3_1: P3.1 S2.2 | length 9.6
  Top Layer w0.254: S2.2 S2.2@115.951,126.332
  Top Layer w0.381: P3.1 113.995,128.287 S2.2@115.951,126.332
NetU1_2: U1.2 U2.3 | length 14.9
  Top Layer w0.254: U2.3 115.757,99.737 120.176,104.157 U1.2
NetU1_5: pad.2@113.614,80.569 U1.5 U2.6 U3.5 | length 40.8
  Top Layer w0.254: v2(111.887,85.331) 115.176,82.042 ; v2(111.887,94.856) 111.917,94.826 111.917,93.573 U2.6 ; pad.2@113.614,80.569 115.113,82.042 115.176,82.042 ; v2(121.717,102.094) 121.784,102.094 121.904,102.214 122.631,102.214 U1.5 ; U3.5 122.636,78.753 118.464,78.753 115.176,82.042
  Bottom Layer w0.254: v2(111.887,85.331) 111.887,95.618 118.363,102.094 v2(121.717,102.094)
NetU2_8: U2.8 U3.3 | length 16
  Top Layer w0.254: U2.8 110.804,88.464 110.804,87.684 118.431,80.057 U3.3
POWER: C8.1 C10.1 J3.3 J3.4 P2.1 Q1.5 Q1.6 Q1.7 Q1.8 Q3.5 Q3.6 Q3.7 Q3.8 R8.2 | length 81.7
  Top Layer w0.254: R8.2 143.706,130.259 P2.1
  Top Layer w0.508: R8.2 R8.2@143.579,130.132 ; P2.1 149.757,137.02 154.051,137.02 J3.3 J3.4
  Bottom Layer w0.254: 147.256,122.859 147.447,123.05 ; J3.3 J3.3@157.924,133.527
  Bottom Layer w2.54: 140.621,88.379 147.447,88.379 147.447,111.874 ; 141.224,111.874 147.447,111.874 ; P2.1 147.447,134.607 147.447,123.05 147.447,111.874
  other v2: 138.372,86.252 139.007,86.252 139.642,86.252 140.277,86.252 138.372,86.887 139.007,86.887 139.642,86.887 140.277,86.887 138.372,87.522 139.007,87.522 139.642,87.522 140.277,87.522 138.3,109.72 138.935,109.72 139.57,109.72 140.205,109.72 138.3,110.355 138.935,110.355 139.57,110.355 140.205,110.355 138.3,110.99 138.935,110.99 139.57,110.99 140.205,110.99
pads on no net: U1.6 U2.11 U2.12 U2.13 U3.6
copper on no net: | length 154.5
  Top Layer w0.254: 84.488,61.421 84.996,59.897 ; 84.488,138.373 84.996,139.897 ; 84.742,59.897 85.25,59.897 ; 84.742,139.897 85.25,139.897 ; 84.996,94.793 84.996,59.897 ; 84.996,105.001 84.996,139.897 ; 85.504,61.421 84.996,59.897 ; 85.504,138.373 84.996,139.897 ; 89.996,149.747 89.996,150.255 ; 91.52,149.493 89.996,150.001 ; 91.52,150.509 89.996,150.001 ; 124.892,150.001 89.996,150.001 ; 135.1,150.001 169.996,150.001 ; 168.472,149.493 169.996,150.001 ; 168.472,150.509 169.996,150.001 ; 169.996,149.747 169.996,150.255
  other v3: 124.206,77.965 124.714,77.965 125.222,77.965 124.206,78.6 124.714,78.6 125.222,78.6 124.206,79.235 124.714,79.235 125.222,79.235 124.206,79.87 124.714,79.87 125.222,79.87 124.206,80.505 124.714,80.505 125.222,80.505 124.206,101.46 124.714,101.46 125.222,101.46 124.206,102.095 124.714,102.095 125.222,102.095 124.206,102.73 124.714,102.73 125.222,102.73 124.206,103.365 124.714,103.365 125.222,103.365 124.206,104 124.714,104 125.222,104
  other v4: 95,65 165,65 95,135 165,135

## Polygon pours and split planes (outlines as drawn)
NetC3_1 on Top Layer "NETC3_1_L01_P000" (solid, pour order 0): 131.659,103.698 131.799,103.559 131.801,103.548 131.801,103.099 131.559,102.857 126.803,102.857 126.217,103.442 126.268,103.698 129.431,103.698
NetC6_1 on Top Layer "NETC6_1_L01_P010" (solid, pour order 10): 132.149,79.241 132.385,79.477 132.385,80.214 127.541,80.214 126.376,80.214 126.247,79.999 127.006,79.241 130.81,79.241
GND on Top Layer "GND_L01_P012" (solid, pour order 12): 152.344,97.269 152.344,94.856 142.164,94.856 142.164,97.269
NetC3_1 on Top Layer "NETC3_1_L01_P017" (solid, pour order 17): 141.295,105.054 141.295,102.54 161.036,102.54 161.036,105.054
NetC6_1 on Top Layer "NETC6_1_L01_P020" (solid, pour order 20): 141.422,80.899 141.422,78.346 147.32,78.346 147.32,80.899
NetJ5_2 on Top Layer "NETJ5_2_L01_P022" (solid, pour order 22): 148.082,80.886 148.082,78.346 160.909,78.346 160.909,80.886 161.036,80.886
GND on Top Layer "GND_L01_P034" (solid, pour order 34): 143.637,138.036 141.986,136.512 141.986,125.59 131.572,115.176 126.492,115.176 125.222,113.906 125.222,63.921 127.294,61.849 163.792,61.849 168.084,65.602 168.084,134.221 164.27,138.036
AGND on Top Layer "AGND_L01_P035" (solid, pour order 35): 95.91,138.036 91.821,134.202 91.821,65.913 95.885,61.849 122.328,61.849 124.46,63.981 124.46,114.578 125.905,115.938 131.016,115.938 141.176,126.098 141.176,136.511 139.827,138.036
NetC3_1 on Bottom Layer "NETC3_1_L02_P002" (solid, pour order 2): 138.307,107.489 141.347,107.489 141.347,101.46 138.303,101.46
NetC3_1 on Bottom Layer "NETC3_1_L02_P003" (solid, pour order 3): 136.906,104.127 138.811,106.032 139.065,106.032 139.065,101.46 137.033,101.46 135.636,102.857 127.326,102.857 127.326,103.695 129.751,104.127
NetC6_1 on Bottom Layer "NETC6_1_L02_P005" (solid, pour order 5): 138.37,83.891 141.41,83.891 141.41,77.862 138.366,77.862
NetC6_1 on Bottom Layer "NETC6_1_L02_P006" (solid, pour order 6): 136.735,80.505 138.749,82.41 139.065,82.41 139.065,77.709 137.033,77.709 135.507,79.235 127.326,79.235 127.326,80.193 130.248,80.505
GND on Bottom Layer "GND_L02_P011" (solid, pour order 11): 151.86,97.269 151.86,94.856 149.694,94.856 149.694,97.269
GND on Bottom Layer "GND_L02_P013" (solid, pour order 13): 138.303,95.364 138.811,94.856 144.597,94.86 144.597,97.269 138.303,97.269
GND on Bottom Layer "GND_L02_P015" (solid, pour order 15): 149.85,73.266 ccw(c148.407,75.853) 151.257,75.044 152.527,74.917 152.527,70.98 138.938,70.98 138.372,71.488 138.37,73.217 138.37,73.266
NetC3_1 on Bottom Layer "NETC3_1_L02_P016" (solid, pour order 16): 139.954,105.054 144.145,105.054 144.145,102.54 139.954,102.54
NetC6_1 on Bottom Layer "NETC6_1_L02_P019" (solid, pour order 19): 139.446,78.346 144.526,78.346 144.526,80.899 139.446,80.899
NetD1_1 on Bottom Layer "NETD1_1_L02_P024" (solid, pour order 24): 131.312,108.941 131.318,108.936 131.318,106.159 136.271,106.159 137.541,106.667 137.541,107.556 133.35,107.556 132.334,108.953
NetD1_2 on Bottom Layer "NETD1_2_L02_P025" (solid, pour order 25): 130.429,109.143 130.429,105.397 128.651,105.397 128.651,109.143
NetD6_2 on Bottom Layer "NETD6_2_L02_P027" (solid, pour order 27): 129.159,85.458 130.683,85.458 130.683,81.902 129.159,81.902
NetD6_1 on Bottom Layer "NETD6_1_L02_P028" (solid, pour order 28): 131.699,85.458 131.699,82.664 136.567,82.664 137.598,83.05 137.598,83.892 133.858,83.892 132.588,85.458
NetD4_1 on Bottom Layer "NETD4_1_L02_P029" (solid, pour order 29): 131.445,96.126 131.445,99.428 132.842,99.428 136.017,97.142 137.541,97.142 137.541,96.126
NetD9_1 on Bottom Layer "NETD9_1_L02_P030" (solid, pour order 30): 131.699,72.059 131.699,75.806 132.969,75.806 135.763,73.216 137.615,73.216 137.615,72.188
NetD9_2 on Bottom Layer "NETD9_2_L02_P031" (solid, pour order 31): 129.286,75.425 129.286,72.25 130.429,72.25 130.429,75.425
AGND on Bottom Layer "AGND_L02_P044" (solid, pour order 44): 139.81,138.035 141.08,136.511 141.207,126.097 130.997,115.937 125.872,115.937 124.443,114.577 124.443,63.994 122.297,61.849 95.885,61.849 91.821,65.913 91.821,134.209 95.839,138.035
GND on Bottom Layer "GND_L02_P045" (solid, pour order 45): 125.205,63.867 127.223,61.849 163.718,61.849 168.064,65.737 168.064,134.188 164.232,138.035 143.62,138.035 141.969,136.511 141.969,125.589 131.555,115.175 126.475,115.175 125.205,113.905
no net on Bottom Solder "NONET_L02_P-001" (solid): 140.868,89.687 141.453,89.687 141.453,89.637 147.447,89.637 147.447,87.122 140.868,87.122
no net on Bottom Solder "NONET_L02_P-001" (solid): 140.792,113.284 141.376,113.284 141.376,113.132 146.355,113.132 146.355,110.592 140.792,110.592
no net on Bottom Solder "NONET_L02_P047" (solid): 149.827,73.266 ccw(c148.384,75.853) 151.233,75.044 152.503,74.917 152.503,70.98 138.914,70.98 138.348,71.488 138.347,73.217 138.347,73.266
no net on Bottom Solder "NONET_L02_P046" (solid): 151.837,97.269 151.837,94.856 149.671,94.856 149.671,97.269

## Keep-outs
Top Layer:
  lines w0.254: 89.996,65.024 ccw(c94.996,65.024) 94.996,60.024 ; 89.996,135.001 cw(c94.996,135.001) 94.996,140.001 ; 90,65.024 90,135.001 ; 94.996,60 165,60 ; 94.996,140 165,140 ; 165.02,60.024 ccw(c165.02,65.024) 170.02,65.024 ; 165.02,140.001 cw(c165.02,135.001) 170.02,135.001 ; 170,65.024 170,135.001

## Other copper
Top Layer:
  pour cut-out: 123.774,80.95 125.628,80.95 125.628,77.546 123.774,77.546 123.774,77.521
  pour cut-out: 123.774,104.445 125.628,104.445 125.628,101.041 123.774,101.041 123.774,101.016
  pour cut-out: 137.121,112.472 137.121,107.979 141.312,107.979 141.312,112.477
  pour cut-out: 137.135,102.054 137.135,97.561 141.326,97.561 141.326,102.059
  pour cut-out: 137.194,89.003 137.194,84.511 141.385,84.511 141.385,89.008
  pour cut-out: 137.187,78.193 137.187,73.701 141.378,73.701 141.378,78.199
  text "80 (mm)" at 125.146,149.087 h1.52
  text "80 (mm)" at 85.91,95.047 h1.52 r90
Bottom Layer:
  pour cut-out: 123.774,104.445 125.628,104.445 125.628,101.041 123.774,101.041 123.774,101.016
  pour cut-out: 123.774,80.95 125.628,80.95 125.628,77.546 123.774,77.546 123.774,77.521

## Silkscreen, mask and mechanical layers (free items; w line width, h text height)
Top Overlay:
  drawing of 954 lines, arcs and shapes, not listed
  text "GND" at 118.467,138.145 h1
  text "+12V" at 128.328,138.139 h1
  text "GND" at 133.3,138.12 h1
  text "POWER" at 145.694,138.136 h1
  text "GND" at 151.512,138.12 h1
  text "+3V3" at 113.148,138.057 h1
  text "GND" at 137.947,137.527 h1
  text "POWER" at 159.283,132.98 h1
  text "GND" at 159.385,130.364 h1
  text "+12V" at 137.973,125.755 h1
  text "+3V3" at 100.559,116.241 h1
  text "GND" at 100.736,114.082 h1
  text "Gate" at 133.401,109.79 h1
  text "Source" at 130.708,101.408 h1
  text "Gate" at 133.655,99.808 h1
  text "ENABLE" at 98.947,97.815 h1
  text "V_sensor" at 155.297,95.428 h1
  text "GND" at 160.223,95.413 h1
  text "PWM_L" at 99.277,94.996 h1
  text "PWM_L" at 96.85,92.837 h1
  text "PWM_R" at 96.901,90.17 h1
  text "PWM_R" at 99.111,87.63 h1
  text "Gate" at 133.833,86.269 h1
  text "GND" at 100.465,84.999 h1
  text "ENABLE" at 112.008,78.235 h1
  text "Source" at 131.013,77.71 h1
  text "Gate" at 133.833,75.906 h1
Top Solder:
  region: 141.427,80.899 147.32,80.899 147.32,78.343 141.405,78.343
  region: 141.324,105.054 157.759,105.054 157.759,102.337 157.556,102.54 141.302,102.54
  region: 142.164,97.269 152.324,97.269 152.324,94.844 142.142,94.844
  region: 148.092,80.89 158.115,80.89 158.115,78.334 148.069,78.334
Bottom Solder:
  lines w2.54: 147.447,88.379 147.447,111.874 147.447,123.05 147.447,134.607 ; 152.423,72.242 152.423,96.761 152.424,123.05 152.424,134.607

## Text inside footprints (layer, text, board x,y; h text height)
J6: Top Overlay "I_sensor" at 157.582,65.481 h1; Top Overlay "GND" at 157.404,62.636 h1; Top Overlay "1" at 146.228,62.636 h1